# EAGLE board MAX4239basedV2 (EAGLE 8.5.1)
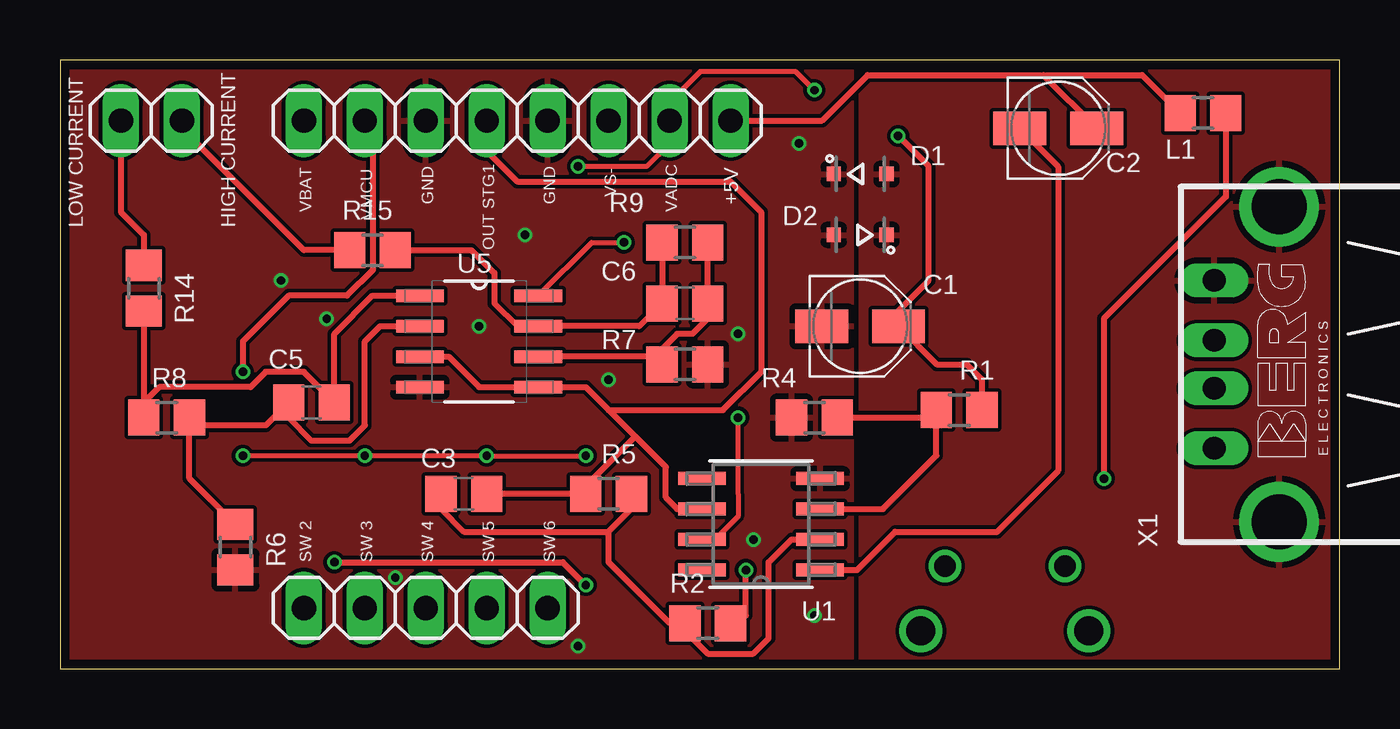
[diagram p0: board, top side]
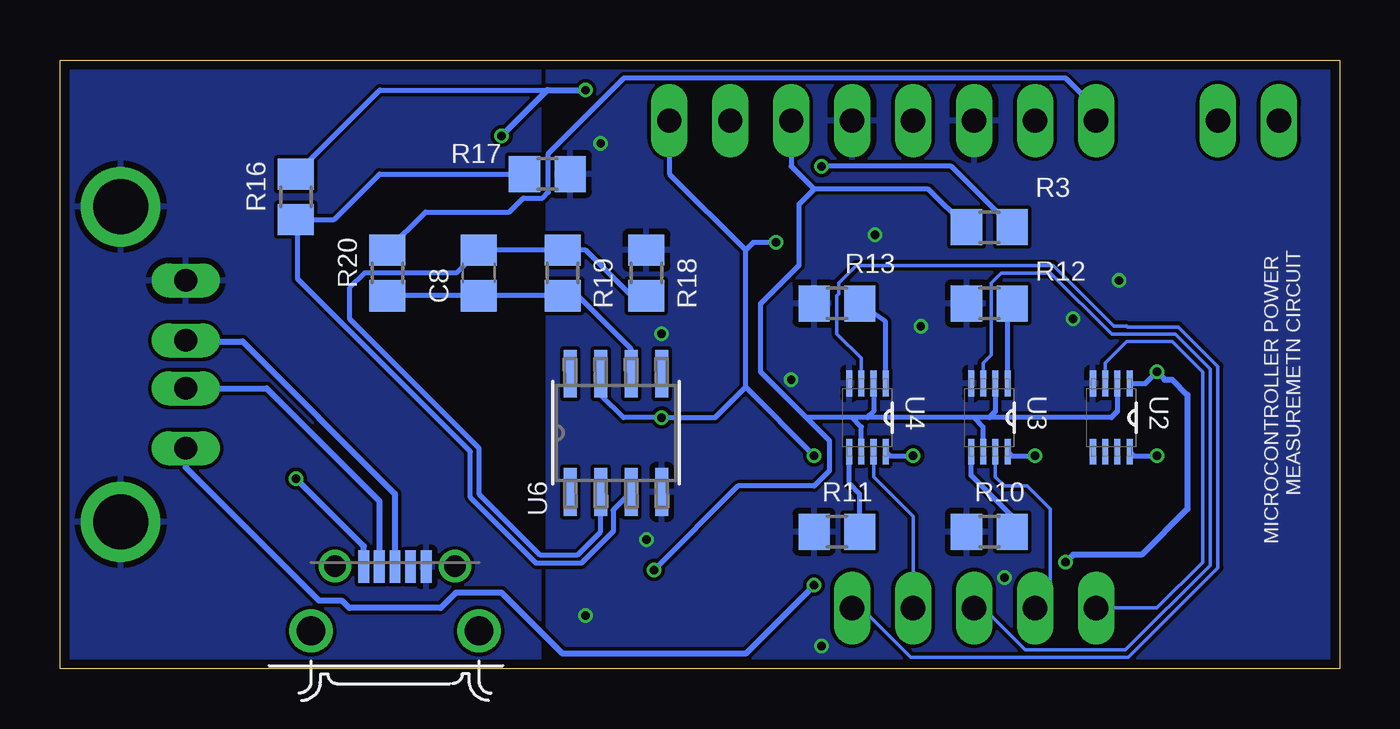
[diagram p1: board, bottom side, seen from below]

Size 53.33 x 25.39 mm. Coordinates in mm from the lower left corner, seen from the top.
Outline: 0,0 53.33,0 53.33,25.39 0,25.39 0,0
Copper layers (1*16): Top 0.035559375mm / dielectric 1.6mm / Bottom 0.035559375mm
Design rules "oshpark-2layer": minimum track width 6mil, minimum drill 10mil, track to track 6mil, track to pad 6mil, pad to pad 6mil, via to via 6mil, smd to smd 6mil, copper to edge 15mil, drill to drill 6mil, minimum pad ring 5mil, minimum via ring 5mil, stop-mask expansion 2.5mil, vias tented up to drill 0mil, thermal gap 10mil

## Footprints (pad centres in the part's own frame; a part is rotated, then mirrored left to right if it is on the bottom)
PANASONIC_B = smd 2.2 x 1.4: + 1.6,0; - -1.6,0
C0805 = smd 1.3 x 1.5: 1 -0.95,0; 2 0.95,0
SOD323 = smd 0.6 x 0.6: A 1.1,0; C -1.1,0
FRAMATOME_10118194-0001LF = smd 0.45 x 1.35: 1 -1.3,2.675; 2 -0.65,2.675; 3 0,2.675; 4 0.65,2.675; 5 1.3,2.675 | drill 0.9: P$6 -2.5,2.7; P$7 2.5,2.7 | drill 1.2: P$8 -3.5,0; P$9 3.5,0
1X02 = drill 1.016 long: 1 -1.27,0; 2 1.27,0
1X05 = drill 1.016 long: 1 -5.08,0; 2 -2.54,0; 3 0,0; 4 2.54,0; 5 5.08,0
1X08 = drill 1.016 long: 1 -8.89,0; 2 -6.35,0; 3 -3.81,0; 4 -1.27,0; 5 1.27,0; 6 3.81,0; 7 6.35,0; 8 8.89,0
R0805 = smd 1.3 x 1.5: 1 -0.95,0; 2 0.95,0
21-0041B_8 = smd 1.981 x 0.533: 1 -2.464,1.905; 2 -2.464,0.635; 3 -2.464,-0.635; 4 -2.464,-1.905; 5 2.464,-1.905; 6 2.464,-0.635; 7 2.464,0.635; 8 2.464,1.905
SOP50P310X90-8N = smd 1.067 x 0.254: 1 -1.422,0.762; 2 -1.422,0.254; 3 -1.422,-0.254; 4 -1.422,-0.762; 5 1.422,-0.762; 6 1.422,-0.254; 7 1.422,0.254; 8 1.422,0.762
SOIC127P600X175-8N = smd 1.981 x 0.533: 1 -2.464,1.905; 2 -2.464,0.635; 3 -2.464,-0.635; 4 -2.464,-1.905; 5 2.464,-1.905; 6 2.464,-0.635; 7 2.464,0.635; 8 2.464,1.905
SO-8_S = smd 1.981 x 0.533: 1 -2.464,1.905; 2 -2.464,0.635; 3 -2.464,-0.635; 4 -2.464,-1.905; 5 2.464,-1.905; 6 2.464,-0.635; 7 2.464,0.635; 8 2.464,1.905
PN87520-S = drill 0.95 long: 1 -3.5,2.71; 2 -1,2.71; 3 1,2.71; 4 3.5,2.71 | drill 2.3 pad 2.9: S1 -6.57,0; S2 6.57,0

## Placement (x,y rotation side)
C1  0.1u  [PANASONIC_B]  33.34,14.29 0 top
C2  0.1u  [PANASONIC_B]  41.59,22.54 0 top
C3  10p  [C0805]  16.83,7.3 180 top
C5  10p  [C0805]  10.48,11.11 180 top
C6  10p  [C0805]  26.04,15.24 0 top
C8  10p  [C0805]  35.88,16.51 90 bottom
D1  CUS08F30  [SOD323]  33.34,20.64 0 top
D2  CUS08F30  [SOD323]  33.34,18.1 180 top
J1  10118194-0001LF  [FRAMATOME_10118194-0001LF]  39.37,1.59 0 bottom
JP1  ADC_CURR  [1X02]  3.81,22.86 0 top
JP2  SWITCH_PINS  [1X05]  15.24,2.54 0 top
JP4  UTILITY2  [1X08]  19.05,22.86 0 top
L1  1K@1MHz  [R0805]  47.62,23.18 0 top
R1  10k  [R0805]  37.47,10.79 0 top
R2  10k  [R0805]  26.99,1.91 0 top
R3  4R7  [R0805]  14.61,18.41 0 bottom
R4  100k  [R0805]  31.43,10.48 0 top
R5  100k  [R0805]  22.86,7.3 0 top
R6  10k  [R0805]  7.3,5.08 270 top
R7  100k  [R0805]  26.04,12.7 0 top
R8  187k  [R0805]  4.45,10.48 0 top
R9  51k  [R0805]  26.04,17.78 0 top
R10  1k  [R0805]  14.61,5.71 0 bottom
R11  100k  [R0805]  20.95,5.71 0 bottom
R12  10k  [R0805]  14.61,15.24 0 bottom
R13  1M  [R0805]  20.95,15.24 0 bottom
R14  49.9  [R0805]  3.49,15.88 270 top
R15  49.9  [R0805]  13.02,17.46 0 top
R16  20k  [R0805]  43.5,19.68 90 bottom
R17  10k  [R0805]  33.02,20.64 180 bottom
R18  20k  [R0805]  28.89,16.51 270 bottom
R19  10k  [R0805]  32.38,16.51 270 bottom
R20  49.9  [R0805]  39.69,16.51 90 bottom
U1  MAX4239ASA  [21-0041B_8]  29.21,6.03 180 top
U2  TS5A23167DCUR  [SOP50P310X90-8N]  9.53,10.48 270 bottom
U3  TS5A23166DCUR  [SOP50P310X90-8N]  14.61,10.48 270 bottom
U4  TS5A23166DCUR  [SOP50P310X90-8N]  19.68,10.48 270 bottom
U5  LTC6241CS8PBF  [SOIC127P600X175-8N]  17.46,13.65 0 top
U6  LTC6240CS8PBF  [SO-8_S]  30.16,9.84 90 bottom
X1  PN87520-S  [PN87520-S]  50.8,12.7 90 top

## Library data of the parts
C1-C3 C5 C6 C8 L1 R1-R20 = resistor
D1 D2 = CUS08F30; DESCRIPTION: DIODE SCHOTTKY 30V 800MA USC, 220mV @ 10mA, SOD-23 OR SC-76; MF: TOSHIBA; MP: CUS08F30; PACKAGE: SOD-323 Vishay Semiconductor; PRICE: None
J1 = 10118194-0001LF; AVAILABILITY: Good; DESCRIPTION: Conn Micro USB Type B RCP 5 POS 0.65mm Solder RA SMD 5 Terminal 1 Port T/R; MF: Amphenol; MP: 10118194-0001LF; PACKAGE: DIP-4 FCI; PRICE: 0.24 USD
JP1 JP2 JP4 = pinhead
U1 = MAX4239ASA; AVAILABILITY: Warning; DESCRIPTION: Linear IC - Op-amp Maxim Integrated MAX4239ASA+ Multi-purpose SOIC 8 N; MF: Maxim Integrated; MP: MAX4239ASA+; PACKAGE: SOIC-8 Maxim Integrated; PRICE: 2.22 USD
U2 = TS5A2316XDCUR; AVAILABILITY: Good; DESCRIPTION: 0.9-Ohm Dual SPST Analog Switch 5-V/3.3-V 2-Channel Analog Switch 8-VSSOP -40 to 85; MF: Texas Instruments; MP: TS5A23167DCUR; PACKAGE: VFSOP-8 Texas Instruments; PRICE: 0.46 USD
U3 U4 = TS5A2316XDCUR; AVAILABILITY: Good; DESCRIPTION: 0.9-Ohm Dual SPST Analog Switch 5-V/3.3-V 2-Channel Analog Switch 8-VSSOP -40 to 85; MF: Texas Instruments; MP: TS5A23166DCUR; PACKAGE: VFSOP-8 Texas Instruments; PRICE: 0.46 USD
U5 = LTC6241CS8PBF; AVAILABILITY: Good; DESCRIPTION: LTC6241 - Dual 18MHz, Low Noise, Rail-to-Rail Output, CMOS Op Amp; MF: Linear Technology; MP: LTC6241CS8#PBF; PACKAGE: SO-8 Linear Technology; PRICE: 2.03 USD
U6 = LTC6240CS8PBF; AVAILABILITY: Good; DESCRIPTION: LTC6240 Op Amp CMOS R-R SOICN-8; MF: Linear Technology; MP: LTC6240CS8#PBF; PACKAGE: SOIC-8 Linear Technology; PRICE: 1.20 USD
X1 = con-berg; OC_FARNELL: unknown; OC_NEWARK: unknown

## Nets
+5V: C2.+ JP4.8 L1.1 U1.7 U2.8 U3.8 U4.8 U5.8 U6.7
+5V_USB: J1.1 L1.2
ADC__VOLT: JP4.1 R20.2
ADC_CURRENTHIGH: JP1.2 R15.1
ADC_CURRENTLOW: JP1.1 R14.1
D+: J1.3 X1.3
D-: J1.2 X1.2
DGND: D1.A D2.C J1.5 X1.4 X1.S1 X1.S2
GND: C1.- D1.C D2.A JP4.3 JP4.5 R4.1 R6.2 R7.2 R10.1 R11.1 R12.1 R13.1 R17.1 R18.1 U1.4 U2.4 U3.4 U4.4 U5.4 U6.4
N$1: R16.1 R17.2 U6.3
N$2: C8.1 R19.2 R20.1 U6.6
N$4: C8.2 R18.2 R19.1 U6.2
N$7: C5.1 R8.1 R14.2 U5.1
N$9: C2.- U1.1
N$10: C3.2 R2.1 R5.2 U1.2
N$11: C6.1 R9.1 R15.2 U5.7
N$12: R1.1 R4.2 U1.3
N$13: C5.2 R6.1 R8.2 U5.2
N$15: C6.2 R7.1 R9.2 U5.6
OUT_STAGE1: C3.1 JP4.4 R5.1 U1.6 U5.3 U5.5
SW3_CON: R12.2 U3.1
SW4_CON: R10.2 U3.5
SW5_CON: R13.2 U4.1
SW6_CON: R11.2 U4.5
SWITCH_CTRL_2: JP2.1 U2.3
SWITCH_CTRL_3: JP2.2 U3.7
SWITCH_CTRL_4: JP2.3 U3.3
SWITCH_CTRL_5: JP2.4 U4.7
SWITCH_CTRL_6: JP2.5 U4.3
VBAT: C1.+ JP4.7 R1.2 R3.2 R16.2
VMCU: JP4.2 U2.1 X1.1
VS-: JP4.6 R2.2 R3.1 U2.2 U3.2 U3.6 U4.2 U4.6

## Tracks (layer width: path | path; a pad name or v marks a point on that pad's centre or on a via)
+5V  (via drill 0.35)
  Top 0.203: v7.62,8.89 v12.7,8.89 v17.78,8.89 v21.91,8.89 | v28.26,10.48 28.26,7.62 28.26,7.3 28.26,6.35 27.3,5.4 U1.7 | U5.8 22.15,17.78 v23.5,17.78
  Top 0.254: L1.1 45.09,24.77 40.97,24.77 | 40.97,24.77 33.66,24.77 31.75,22.86 JP4.8 | C2.+ 40.97,24.77
  Bottom 0.203: U2.8 8.6,8.89 v7.62,8.89 | U3.8 13.68,8.89 v12.7,8.89 | U4.8 18.76,8.89 v17.78,8.89 | v21.91,8.89 24.77,11.75 | 24.77,11.75 24.77,17.46 | U6.7 30.8,11.43 29.84,10.48 v28.26,10.48 26.04,10.48 24.77,11.75 | v23.5,17.78 24.45,17.78 24.77,17.46 | JP4.8 27.94,20.64 24.77,17.46
+5V_USB  (via drill 0.35)
  Top 0.254: L1.2 48.58,19.68 43.5,14.61 v43.5,7.94
  Bottom 0.254: J1.1 40.67,5.11 v43.5,7.94
ADC__VOLT
  Bottom 0.203: R20.2 38.1,19.05 34.61,19.05 34.02,19.63 33.22,19.63 32.97,19.87 32.97,21.49 29.83,24.64 11.43,24.64 10.16,23.37 JP4.1
ADC_CURRENTHIGH
  Top 0.254: R15.1 10.16,17.46 5.08,22.54 JP1.2
ADC_CURRENTLOW
  Top 0.254: JP1.1 2.54,19.05 3.49,18.1 R14.1
D+
  Bottom 0.254: X1.3 48.04,13.65 45.72,13.65 39.37,7.3 J1.3
D-
  Bottom 0.254: X1.2 44.72,11.7 40.02,7 J1.2
DGND
  pour Top (rank 2): 33.34,25.4 53.34,25.4 53.34,0 33.34,0
  pour Bottom (rank 2): 33.34,25.4 53.34,25.4 53.34,0 33.34,0
GND  (via drill 0.35)
  other vias: 21.59,0.95 17.46,14.29 11.11,14.61 13.97,3.81 22.86,12.06 30.8,21.91 9.21,16.19 31.43,2.22 28.89,5.4 19.37,18.1 28.26,13.97
  pour Bottom (rank 2): 0,25.4 33.02,25.4 33.02,0 0,0
  pour Top (rank 2): 0,0 33.02,0 33.02,25.4 0,25.4
N$1
  Bottom 0.203: U6.3 30.28,6.63 30.28,5.73 31.6,4.41 33.48,4.41 36.23,7.16 36.23,9.06 43.43,16.26 43.43,18.67 R16.1 41.91,18.73 40.01,20.64 R17.2
N$2
  Bottom 0.203: U6.6 29.53,13.34 31.75,15.56 R19.2 C8.1 R20.1
N$4
  Bottom 0.203: U6.2 30.8,5.71 31.75,4.76 33.34,4.76 35.88,7.3 35.88,9.21 41.27,14.61 41.27,15.88 40.64,16.51 36.83,16.51 C8.2 R19.1 31.43,17.46 29.53,15.56 R18.2
N$7
  Top 0.254: R14.2 3.5,11.11 | 3.5,11.11 R8.1 | U5.1 13.02,15.56 11.43,13.97 C5.1 10.16,12.38 8.57,12.38 7.94,11.75 4.13,11.75 3.5,11.11
N$9
  Top 0.254: C2.- 41.59,20.94 41.59,8.26 39.05,5.71 34.8,5.71 33.21,4.13 U1.1
N$10
  Top 0.254: C3.2 15.88,6.67 16.83,5.71 22.85,5.71 | R5.2 23.81,6.67 22.85,5.71 | 22.85,5.71 22.85,4.46 25.4,1.91 R2.1 26.04,1.58 26.99,0.64 28.89,0.64 29.53,1.27 29.53,4.45 30.48,5.4 U1.2
N$11
  Top 0.254: R9.1 C6.1 24.13,14.29 U5.7 19.05,14.29 18.1,15.24 18.1,16.51 17.14,17.46 R15.2
N$12
  Top 0.254: R4.2 35.88,10.48 R1.1 36.52,8.89 34.29,6.67 U1.3
N$13
  Top 0.254: R6.1 5.39,7.94 5.39,10.16 | 5.39,10.16 R8.2 | 5.39,10.16 8.57,10.16 C5.2 9.53,10.47 10.48,9.53 12.06,9.53 12.7,10.16 12.7,13.65 13.34,14.29 U5.2
N$15
  Top 0.254: R9.2 C6.2 26.98,14.6 26.35,13.97 25.72,13.97 25.09,13.34 R7.1 24.77,13.02 U5.6
OUT_STAGE1
  Top 0.254: U5.3 16.19,13.02 17.46,11.75 U5.5 21.91,11.75 22.86,10.79 | C3.1 R5.1 21.91,7.62 23.97,9.68 | 23.97,9.68 25.24,8.41 25.24,7.14 25.72,6.67 U1.6 | 23.97,9.68 22.86,10.79 | 22.86,10.79 27.62,10.79 29.21,12.38 29.21,19.05 27.94,20.32 19.05,20.32 17.78,21.59 JP4.4
SW3_CON
  Bottom 0.203: U3.1 13.84,15.05 R12.2
SW4_CON
  Bottom 0.203: R10.2 13.65,6.35 15.37,8.06 U3.5
SW5_CON
  Bottom 0.203: U4.1 18.92,14.48 R13.2
SW6_CON
  Bottom 0.203: R11.2 20,7.3 20.45,7.75 U4.5
SWITCH_CTRL_2
  Bottom 0.152: U2.3 9.78,12.76 8.89,13.65 6.99,13.65 5.71,12.38 5.71,4.45 7.62,2.54 JP2.1
SWITCH_CTRL_3
  Bottom 0.152: JP2.2 12.06,3.17 12.06,6.67 13.02,7.62 13.97,7.62 14.35,8 U3.7
SWITCH_CTRL_4
  Bottom 0.152: JP2.3 14.86,2.54 13.11,0.79 10.16,0.79 9.69,0.79 8.94,0.79 5.41,4.32 5.41,12.51 6.86,13.96 7.49,13.96 7.62,13.96 9.51,13.96 12.06,16.51 14.11,16.51 14.53,16.09 14.53,13.09 14.86,12.76 U3.3
SWITCH_CTRL_5
  Bottom 0.152: JP2.4 17.78,6.35 19.43,8 U4.7
SWITCH_CTRL_6
  Bottom 0.152: JP2.5 19.94,2.54 17.89,0.48 8.81,0.48 5.08,4.22 5.08,12.61 6.73,14.26 8.87,14.26 8.89,14.29 9.41,14.29 11.95,16.83 20.14,16.83 20.88,16.09 20.88,15.63 20.95,15.56 20.95,13.97 19.94,12.95 U4.3
VBAT  (via drill 0.35)
  Top 0.203: v31.43,24.13 30.66,24.91 26.67,24.91 25.4,23.64 JP4.7 25.4,21.91 24.45,20.95 v21.59,20.95
  Top 0.254: v34.92,22.23 36.2,20.95 36.2,16.19 34.94,14.94 C1.+ 36.52,12.7 37.78,12.7 38.41,12.07 R1.2
  Bottom 0.203: R16.2 40,24.13 v31.43,24.13 | R3.2 16.2,20.95 v21.59,20.95
  Bottom 0.254: v34.92,22.23 33.02,24.13 v31.43,24.13
VMCU  (via drill 0.35)
  Top 0.254: v11.43,4.45 20.95,4.45 v21.91,3.49 | v7.62,12.38 7.62,13.65 9.53,15.56 11.96,15.56 13.04,16.64 13.04,22.52 JP4.2
  Bottom 0.203: U2.1 8.1,11.9 v7.62,12.38
  Bottom 0.254: v7.62,12.38 7.3,12.06 6.99,12.06 6.35,11.43 6.35,6.67 8.26,4.76 11.11,4.76 v11.43,4.45 | v21.91,3.49 24.77,0.64 32.38,0.64 34.92,3.17 36.83,3.17 37.47,2.54 41.27,2.54 41.59,2.86 42.55,2.86 48.09,8.4 X1.1
VS-  (via drill 0.35)
  Top 0.254: R2.2 28.57,2.23 v28.57,4.13
  Bottom 0.203: U2.2 9.27,10.73 9.53,10.48 14.61,10.48 | 14.61,10.48 15.24,10.48 | 15.24,10.48 19.68,10.48 | 19.68,10.48 20.32,10.48 | U3.6 14.86,10.1 15.24,10.48 | U3.2 14.35,10.73 14.61,10.48 | U4.6 19.94,10.1 20.32,10.48 | U4.2 19.43,10.73 19.68,10.48 | 20.32,10.48 22.23,10.48 | 22.23,10.48 24.13,12.38 24.13,15.24 22.54,16.83 22.54,19.37 21.91,20 | R3.1 17.14,20 21.91,20 | 22.23,10.48 21.27,9.53 21.27,8.26 21.91,7.62 25.08,7.62 v28.57,4.13 | JP4.6 22.86,20.95 21.91,20

## Text on the board
tPlace: VS- | VBAT | VMCU | GND | GND | VADC | +5V | LOW CURRENT | HIGH CURRENT | OUT STG1 | SW 2 | SW 3 | SW 4 | SW 5 | SW 6
bPlace: MICROCONTROLLER POWER / MEASUREMETN CIRCUIT